# Altium PCB PassProgrammer.PcbDoc
Units mm, origin at the board's own origin, x right, y up, seen from the top; angles counter-clockwise.
Board outline 50 x 28 mm, 2 copper layers (Top Layer, Bottom Layer), stack 1.535 mm thick; 18 components, 10 nets, 66 pads, 10 vias.
Unrouted connection lines stored in the file: 2.
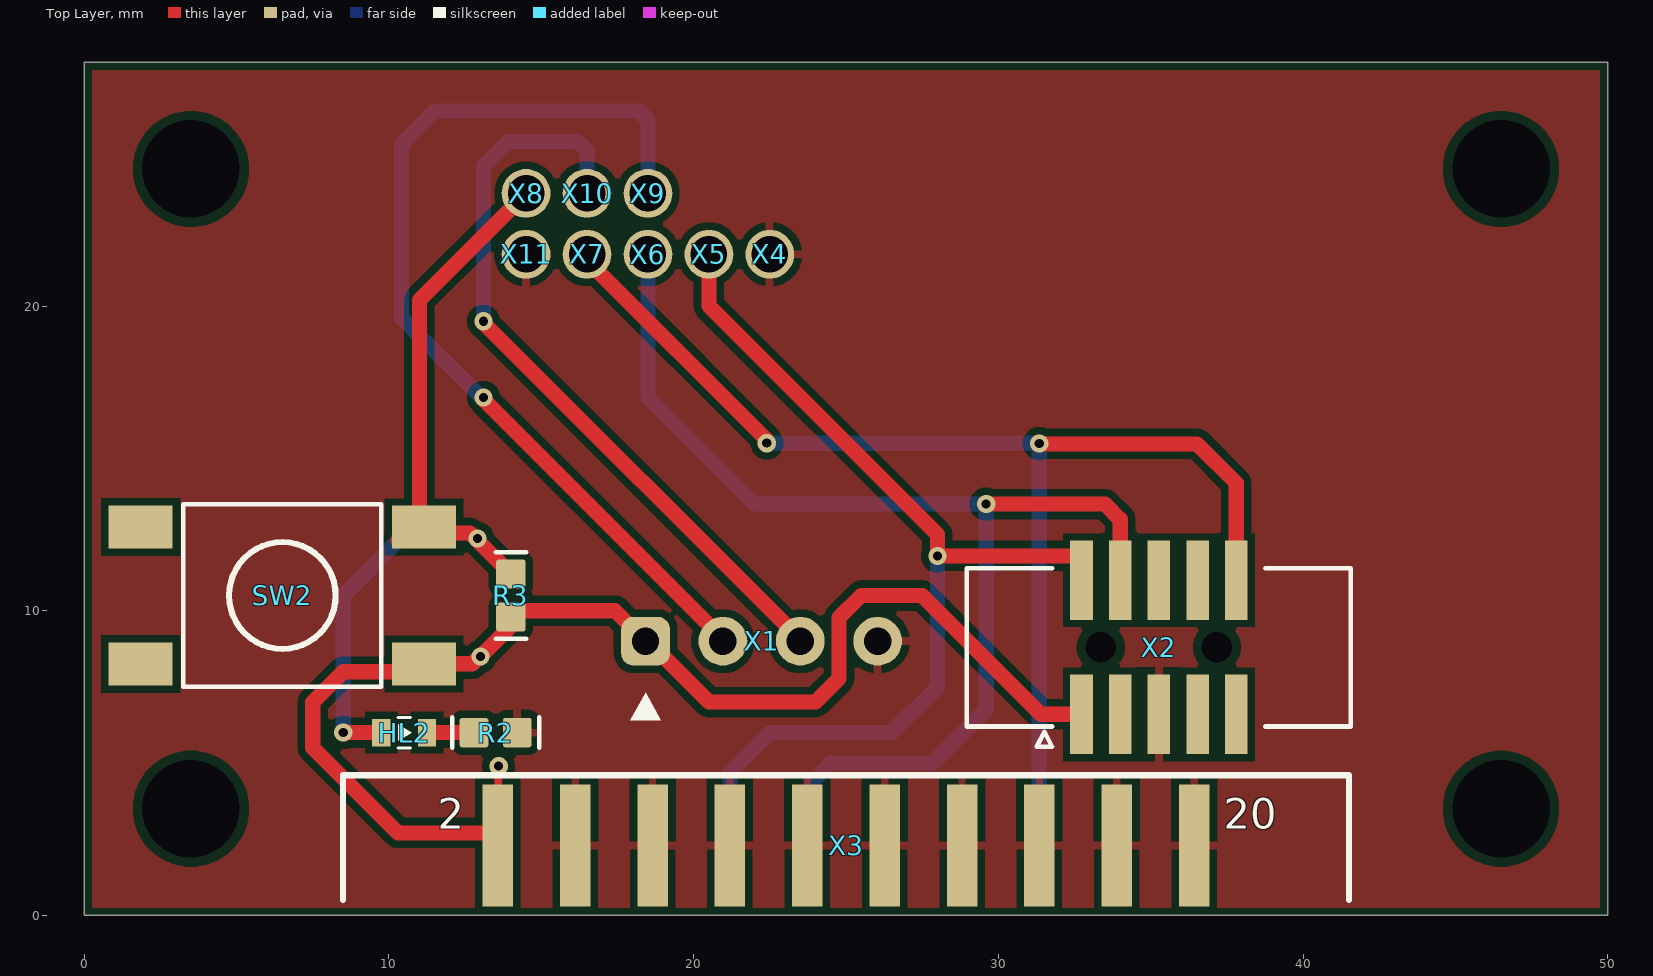
[diagram p0: Top Layer view]
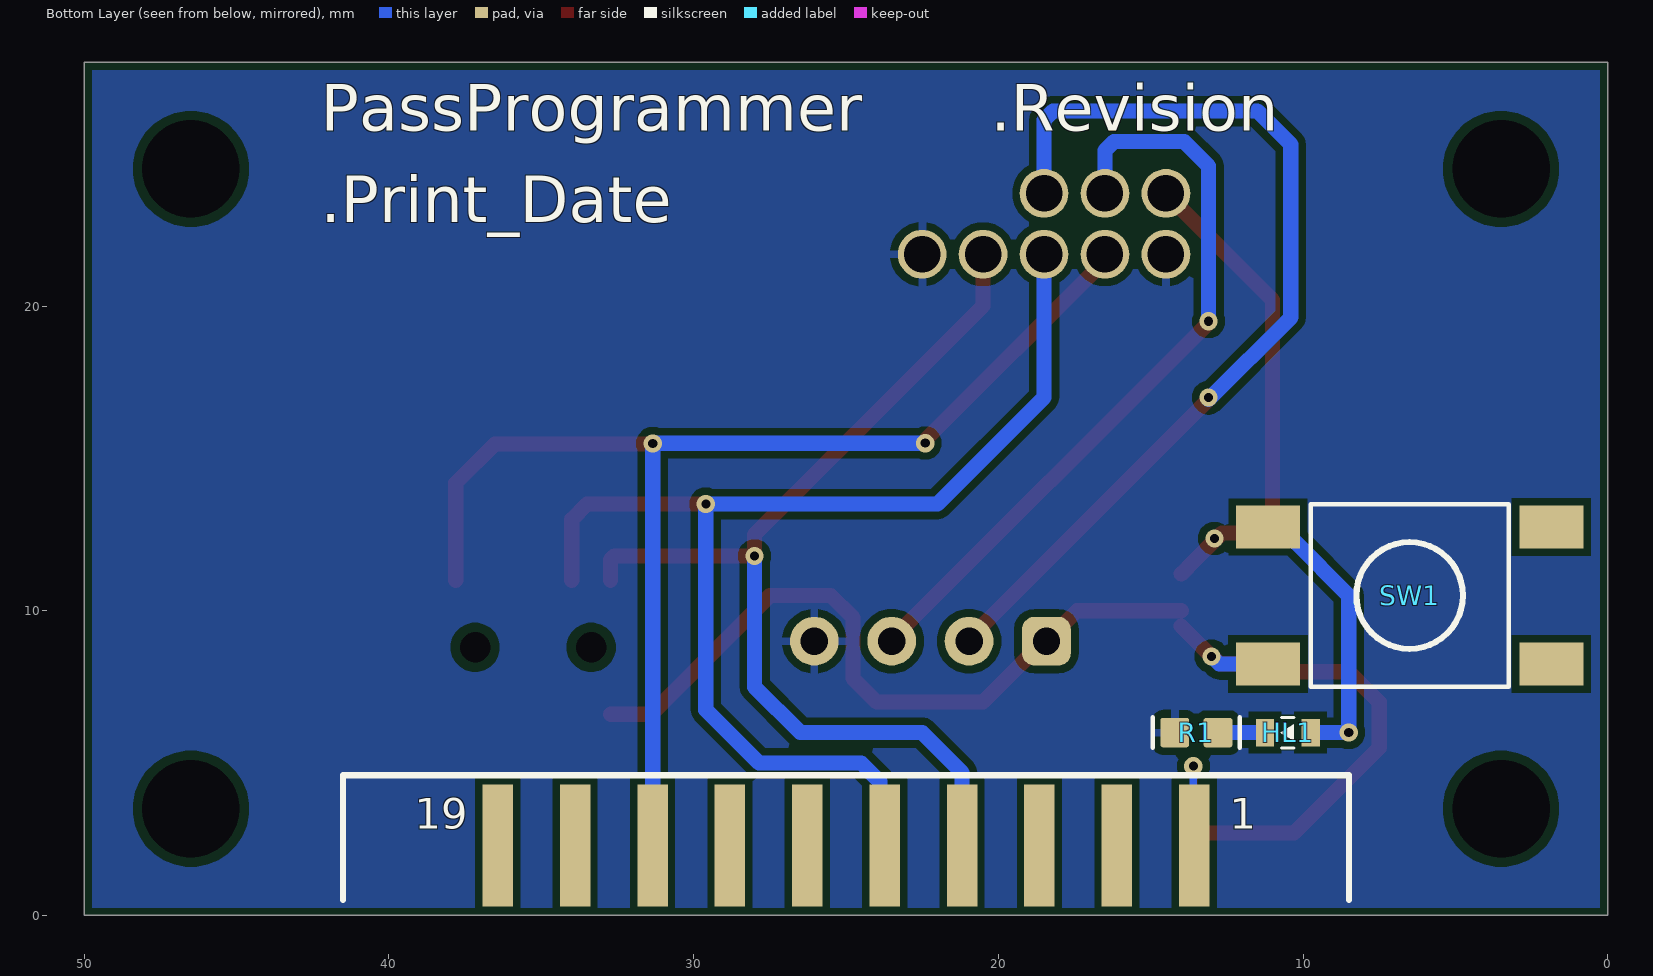
[diagram p1: Bottom Layer view, seen from below]

## Layer stack, top to bottom
Top Solder: solder mask 0.0102, Solder Resist, Dk 3.5
Top Layer: signal copper 0.0175
Dielectric 1: dielectric 1.5, FR-4, Dk 4.8
Bottom Layer: signal copper 0.0175
Bottom Solder: solder mask 0.0102, Solder Resist, Dk 3.5

## Board outline
0,0 0,28 50,28 50,0

## Design rules (kind name [scope] priority, off if disabled: settings)
BoardOutlineClearance [All] p1: gap=0.25 ignorepadtopadclearanceinfootprint=FALSE
Clearance ClearanceJTAG [InNetClass('JTAG')] p1: gap=0.2 ignorepadtopadclearanceinfootprint=FALSE
Clearance ClearanceKeepout [OnLayer('Keep-Out Layer')] p2: gap=0.25 ignorepadtopadclearanceinfootprint=FALSE
Clearance [All] p3: gap=0.15 ignorepadtopadclearanceinfootprint=FALSE except(0.25: Arc-Fill Arc-Poly Arc-Region Track-Fill Track-Poly Track-Region SMDPad-Fill SMDPad-Poly SMDPad-Region THPad-Fill THPad-Poly THPad-Region Via-Fill Via-Poly Via-Region Fill-Fill Fill-Poly Fill-Region Poly-Poly Poly-Region Region-Region; 0.3: Arc-Hole Track-Hole SMDPad-Hole THPad-Hole Via-Hole Fill-Hole Poly-Hole Region-Hole Text-Hole)
MinimumAnnularRing [All] p1: minimumring=0.2
MinimumSolderMaskSliver [All] p1: minsoldermaskwidth=0.15
PolygonConnect [All] p1: thpad.connectstyle=Relief thpad.reliefconductorwidth=0.254 thpad.reliefentries=4 thpad.polygonreliefangle="90 Angle" thpad.airgapwidth=0.254 smdpad.connectstyle=Relief smdpad.reliefconductorwidth=0.254 smdpad.reliefentries=4 smdpad.polygonreliefangle="90 Angle" smdpad.airgapwidth=0.254 via.connectstyle=Direct via.reliefconductorwidth=0.254 via.reliefentries=4 via.polygonreliefangle="90 Angle" via.airgapwidth=0.254
RoutingVias [All] p1: holewidth=0.3 width=0.6 viastyle="Through Hole" minholewidth=0.3 minwidth=0.6 maxholewidth=0.5 maxwidth=1
SilkToSilkClearance [All] p1: silktosilkclearance=0.1
SilkToSolderMaskClearance [IsPad] p1: minsilkscreentomaskgap=0.1 clearancetoexposedcopper=FALSE
SolderMaskExpansion [All] p1: expansion=0.05 istentingtop=FALSE
Width WidthJTAG [InNetClass('JTAG')] p1: maxlimit=0.2 minlimit=0.2 preferedwidth=0.2
Width [All] p2: maxlimit=2 minlimit=0.15 preferedwidth=0.15
27 further rules are at their usual default settings.

## Components (designator, comment, footprint, x,y, rotation, side; value= is the part's Value field where it differs from the comment)
HL1 "FYLS-0603URC" LED_0603_RED 10.5,6 r180 bottom
HL2 "FYLS-0603URC" LED_0603_RED 10.5,6 r180 top
R1 "3.3k" "R0603 (1608 Metric) N" 13.5,6 r0 bottom
R2 "3.3k" "R0603 (1608 Metric) N" 13.5,6 r0 top
R3 "0.0" "R0603 (1608 Metric) N" 14,10.5 r90 top
SW1 "EVQ-PBC04M" "TACT SWITCH 6MM SMD" 6.5,10.5 r0 bottom
SW2 "EVQ-PBC04M" "TACT SWITCH 6MM SMD" 6.5,10.5 r180 top
X1 "PLS-4" PLS-4 22.23,9 r0 top
X2 "KLS1-202C-10-T-B" KLS1-202C-10-T-B 35.27,8.8 r0 top
X3 "BH-20" BH-20-H 25,1 r0 top
X4 "" "POGO-PIN 1,02*15,85"#1 26.5,21.7 r0 top
X5 "" "POGO-PIN 1,02*15,85"#2 23.5,21.7 r0 top
X6 "" "POGO-PIN 1,02*15,85"#3 20.5,21.7 r0 top
X7 "" "POGO-PIN 1,02*15,85"#4 17.5,21.7 r0 top
X8 "" "POGO-PIN 1,02*15,85"#5 14.5,23.7 r0 top
X9 "" "POGO-PIN 1,02*15,85"#6 17.5,18.7 r0 top
X10 "" "POGO-PIN 1,02*15,85"#7 13.5,15.7 r0 top
X11 "" "POGO-PIN 1,02*15,85"#7 11.5,13.7 r0 top

## Footprints (in the part's own frame and the unit in brackets; to place one, negate y for a bottom-side part, rotate by r counter-clockwise, add the part's x,y. Pads: shape width x height; smd on the part's side, far side on the other; paste and mask are expansions set on the pad)
BH-20-H [mm] "Horisontal"
  rect 1x4 smd far side: 1(-11.43,1.3) 3(-8.89,1.3) 5(-6.35,1.3) 7(-3.81,1.3) 9(-1.27,1.3) 11(1.27,1.3) 13(3.81,1.3) 15(6.35,1.3) 17(8.89,1.3) 19(11.43,1.3)
  rect 1x4 smd: 2(-11.43,1.3) 4(-8.89,1.3) 6(-6.35,1.3) 8(-3.81,1.3) 10(-1.27,1.3) 12(1.27,1.3) 14(3.81,1.3) 16(6.35,1.3) 18(8.89,1.3) 20(11.43,1.3)
  silkscreen extent -16.51,-0.5 16.51,3.6, body extent -16.6,-10.47 16.6,1.63, height 4.02
KLS1-202C-10-T-B [mm]
  round 0 hole 1 unplated: 0(-1.905,0) 0(1.905,0)
  rect 0.74x2.6 smd: 1(-2.54,-2.2) 2(-2.54,2.2) 3(-1.27,-2.2) 4(-1.27,2.2) 5(0,-2.2) 6(0,2.2) 7(1.27,-2.2) 8(1.27,2.2) 9(2.54,-2.2) 10(2.54,2.2)
  silkscreen extent -6.3,-3.27 6.3,2.6, body extent -6.27,-3.3 6.27,3.3, height 5.2
LED_0603_RED [mm]
  rect 0.6x0.9 smd: A(0.75,0) C(-0.75,0)
  Top Layer pour cut-out: -0.45,0.6 -0.45,-0.6 0.45,-0.6 0.45,0.6
  silkscreen extent -0.25,-0.5 0.2,0.5, body extent -0.8,-0.4 0.8,0.4, height 0.6
PLS-4 [mm]
  rrect50% 1.6x1.6 hole 0.9: 1(-3.81,0)
  round 1.6 hole 0.9: 2(-1.27,0) 3(1.27,0) 4(3.81,0)
  silkscreen extent -4.31,-2.6 -3.31,-1.7, body extent -5.08,-1.27 5.08,1.27, height 8.54
"POGO-PIN 1,02*15,85"#1 [mm]
  round 1.6 hole 1.2: 1(-4,0)
"POGO-PIN 1,02*15,85"#2 [mm]
  round 1.6 hole 1.2: 1(-3,0)
"POGO-PIN 1,02*15,85"#3 [mm]
  round 1.6 hole 1.2: ""(-2,0)
"POGO-PIN 1,02*15,85"#4 [mm]
  round 1.6 hole 1.2: 1(-1,0)
"POGO-PIN 1,02*15,85"#5 [mm]
  round 1.6 hole 1.2: 1(0,0)
"POGO-PIN 1,02*15,85"#6 [mm]
  round 1.6 hole 1.2: 1(1,5)
"POGO-PIN 1,02*15,85"#7 [mm]
  round 1.6 hole 1.2: 1(3,8)
"R0603 (1608 Metric) N" [mm] "Resistor, Chip; 1.60 mm L X 0.80 mm W X 0.95 mm H body"
  rrect20% 0.95x0.97 smd: 1(-0.71,0) 2(0.71,0)
  Top Layer pour cut-out: -0.2,0.5 0.2,0.5 0.2,-0.5 -0.2,-0.5
  silkscreen extent -1.43,-0.5 1.43,0.5, body extent -0.8,-0.4 0.8,0.4, height 0.95
"TACT SWITCH 6MM SMD" [mm]
  rect 2.1x1.4 smd: 1(-4.65,2.25) 1(4.65,2.25) 2(-4.65,-2.25) 2(4.65,-2.25)
  silkscreen extent -3.25,-3 3.25,3, body extent -5,-3 5,3, height 5.07

## Part data
HL1 HL2: library part "Led 0603 Red", "Led 0603 Red", Manufacturer=FORYARD, Color="Led 0603 Red", ComponentLink1Description=Datasheet, ComponentLink1URL=https://www.elitan.ru/pdf/1/4/8/3/0/14830587.pdf, Part Number=FYLS-0603URC, Points=2
R1 R2: library part RC0603FR-073K3L, "RES SMD 3.3K OHM 1% 1/10W 0603", Manufacturer=Yageo, Operating Temperature="-55°C ~ 155°C", Package / Case="0603 (1608 Metric)", Power (Watts)="0.1W, 1/10W", Supplier Device Package=0603, Supplier Part Number 1=311-3.30KHRCT-ND, Temperature Coefficient=±100ppm/°C, Tolerance=±1%, ValueGOST=3.3кОм, ComponentLink1Description=Datasheet, ComponentLink1URL=http://www.yageo.com/documents/recent/PYu-RC_Grou, Composition="Thick Film", Features="Moisture Resistant", Height - Seated (Max)="0.022\" (0.55mm)", Image=//media.digikey.com/Renders/Yageo%20Renders/0603-(1608-Metric).jpg, Part Number=RC0603FR-073K3L, Part Status=Active, Part Type=Resistor, Points=2, Series=RC, Size / Dimension="0.063\" L x 0.031\" W (1.60mm x 0.80mm)", Supplier 1=Digikey, Unit Price (USD)=0.10000
R3: library part RC0603JR-070RL, "RES SMD 0.0OHM JUMPER 1/10W 0603", Manufacturer=Yageo, Operating Temperature="-55°C ~ 155°C", Package / Case="0603 (1608 Metric)", Power (Watts)="0.1W, 1/10W", Supplier Device Package=0603, Supplier Part Number 1=311-0.0GRCT-ND, Temperature Coefficient=-, Tolerance=Jumper, ComponentLink1Description=Datasheet, ComponentLink1URL=http://www.yageo.com/documents/recent/PYu-RC_Grou, Composition="Thick Film", Features="Moisture Resistant", Height - Seated (Max)="0.022\" (0.55mm)", Image=//media.digikey.com/Renders/Yageo%20Renders/0603-(1608-Metric).jpg, Part Number=RC0603JR-070RL, Part Status=Active, Part Type=Resistor, Points=2, Series=RC, Size / Dimension="0.063\" L x 0.031\" W (1.60mm x 0.80mm)", Supplier 1=Digikey, Unit Price (USD)=0.10000, ValueGOST=0.0
SW1 SW2: "SWITCH TACTILE SPST-NO 0.02A 15V", Contact Rating @ Voltage="0.02A @ 15VDC", Illumination Type, Color=-, Manufacturer="Panasonic Electronic Components", Operating Force=100gf, Supplier Part Number 1=P8013S-ND, Actuator Height off PCB, Vertical=4.30mm, Actuator Length, Right Angle=-, Actuator Orientation="Top Actuated", Actuator Type=Standard, Circuit=SPST-NO, ComponentLink1Description=Datasheet, Features="Grounding Pin", Illumination=Non-Illuminated, Illumination Voltage (Nominal)=-, Image=//media.digikey.com/photos/Panasonic%20Photos/EVQ-PBC04M,%20EVQ-PBD04M,%20EVQ-PBE04M,%20EVQ-PBG04M.jpg, Ingress Protection=-, Mounting Type="Through Hole", Outline="6.00mm x 6.00mm", Packaging=Bulk, Part Number=EVQ-PBC04M, Part Status=Active, Series=EVQPB, Supplier 1=Digikey, Switch Function=Off-Mom, Termination Style="PC Pin", ﻿ComponentLink1URL=https://www3.panasonic.biz/ac/e_download/control/switch/light-touch/catalog/sw_lt_eng_5n.pdf
X2: "5*2 pin 	1.27x1.27mm Pitch Box Header Connector Height 4.9mm", Manufacturer=KLS, ComponentLink1Description=Datasheet, ComponentLink1URL=https://www.klsele.com/admin/product_upload/20200628111111L-KLS1-202CE.pdf, Local Supplier=https://www.elitan.ru/price/item16066919, Mounting Type="0.050\" (1.27mm)", Number of Positions=5, Number of Rows=2, Part Number=KLS1-202C-10-T-B, Pitch="0.050\" (1.27mm)"
X3: library part Terminal_2x10_JTAG, Part Number=BH-20
X4 X5 X6 X7 X8 X9 X10 X11: library part PogoPin
X1: Part Number=PLS-4, Series=PLS

## Free pads (board coordinates)
  round 2 hole 3.2 unplated: 0(3.5,3.5) 0(3.5,24.5) 0(46.5,3.5) 0(46.5,24.5)

## Via types
v1: diameter 0.6, hole 0.3, Top Layer to Bottom Layer, tented both sides, 10 vias

## Nets (pads, with @x,y where several pads share a name; then routed paths per layer and width w, separated by ;. In a path a pad name is that pad's centre, name@x,y a point inside that pad or via, vN(x,y) a via of type N, cw(c..) or ccw(c..) an arc to the next point about the centre after c; other vN are vias at no path point)
GND: R1.2 R2.2 X1.4 X2.5 X3.4 X3.6 X3.8 X3.10 X3.12 X3.14 X3.16 X3.18 X3.20 X4.1 X11.1
NetHL1_C: HL1.C R1.1 | length 1.5
  Bottom Layer w0.5: HL1.C R1.1
NetHL2_C: HL2.C R2.1 | length 1.5
  Top Layer w0.5: HL2.C R2.1
RESET: X2.10 X3.15 X7.1 | length 41
  Top Layer w0.5: X7.1 16.5,21.5 22.4,15.6 v1(22.4,15.5) ; v1(31.343,15.489) 31.358,15.474 36.526,15.474 37.81,14.19 X2.10
  Bottom Layer w0.5: v1(22.4,15.5) 22.405,15.495 31.337,15.495 v1(31.343,15.489) 31.346,15.486 31.346,2.304 X3.15
RX: X1.3 X10.1 | length 25.2
  Top Layer w0.5: v1(13.1,19.5) 13.1,19.45 23.5,9.05 X1.3
  Bottom Layer w0.5: v1(13.1,19.5) 13.1,24.6 13.9,25.4 16.207,25.4 16.5,25.107 X10.1
SWDCLK: X2.4 X3.9 X6. | length 39.5
  Top Layer w0.5: v1(29.6,13.5) 33.5,13.5 34,13 X2.4
  Bottom Layer w0.5: X6. 18.5,17 22,13.5 v1(29.6,13.5) 29.6,6.741 27.859,5 24.5,5 23.895,4.395 X3.9@23.895,2.165
SWDIO: X2.2 X3.7 X5.1 | length 33.4
  Top Layer w0.5: X5.1 20.5,20 28,12.5 v1(28,11.8) 32.61,11.8 32.73,11.68 X2.2
  Bottom Layer w0.5: X3.7@21.19,2 21.19,4.69 22.5,6 26.5,6 28,7.5 v1(28,11.8)
TX: X1.2 X9.1 | length 31.8
  Top Layer w0.5: v1(13.1,17) 13.1,16.93 20.96,9.07 X1.2
  Bottom Layer w0.5: v1@13.1,16.93 10.4,19.63 10.4,25.3 11.5,26.4 18.207,26.4 18.5,26.107 X9.1
VCC: R3.1 SW1.1 SW2.1 X1.1 X2.1 X3.1 X3.2 | length 47.6
  Top Layer w0.25: X3.2@13.585,2.315 v1@13.585,4.885
  Top Layer w0.5: SW2.1@10.778,8 8.5,8 7.5,7 7.5,5.5 10.293,2.707 13.163,2.707 X3.2 X3.2@13.585,2.315 ; SW2.1@10.778,8.257 12.73,8.257 12.973,8.5 v1(13,8.5) R3.1@14,9.5 ; v1@13.585,4.885 v1(13.6,4.9) ; R3.1@14,10 17.42,10 X1.1 ; X1.1@18.5,9 20.5,7 24,7 24.771,7.771 24.771,9.771 25.5,10.5 27.5,10.5 31.4,6.6 X2.1
  Bottom Layer w0.25: X3.1 13.6,2.33 v1(13.6,4.9)
  Bottom Layer w0.5: SW1.1@11.15,8.25 12.75,8.25 v1(13,8.5)
VCCM: HL1.A HL2.A R3.2 SW1.2 SW2.2 X8.1 | length 25.9
  Top Layer w0.5: v1(8.5,6) HL2.A@9.5,6 ; SW2.2@10.3,12.3 10.35,12.3 10.5,12.45 SW2.2@10.5,12.5 ; R3.2 13.99,11.21 13.765,11.435 13.765,11.445 12.657,12.553 11.347,12.553 11.15,12.75 11,12.9 11,14.5 11,20.2 X8.1
  Bottom Layer w0.5: HL1.A v1(8.5,6) 8.5,10.5 10.3,12.3 10.35,12.3 10.5,12.45 SW1.2@10.5,12.5
  other v1: 12.905,12.373
pads on no net: X2.0 X2.3 X2.6 X2.7 X2.8 X2.9 X3.3 X3.5 X3.11 X3.13 X3.17 X3.19

## Polygon pours and split planes (outlines as drawn)
GND on Bottom Layer "GND_L02_P001" (solid, pour order 1): 0,28 50,28 50,0 0,0
GND on Top Layer "GND_L01_P000" (solid, pour order 0): 0,28 50,28 50,0 0,0

## Silkscreen, mask and mechanical layers (free items; w line width, h text height)
Bottom Overlay:
  text ".Revision" at 20.246,25.754 h1.52
  text "PassProgrammer" at 42.246,25.762 h1.52
  text ".Print_Date" at 42.246,22.754 h1.52
Mechanical 1:
  the board outline again, w0.2
Mechanical 2:
  circle w0.15: c46.5,24.5 r3.5
  circle w0.15: c3.5,24.5 r3.5
  circle w0.15: c46.5,3.5 r3.5
  circle w0.15: c3.5,3.5 r3.5
Board:
  lines w0.01: 12.6,15 12.6,60.6 37.4,60.6 37.4,15 12.6,15

## Text inside footprints (layer, text, board x,y; h text height)
X3: Top Overlay "20" at 37.4,2.85 h1; Top Overlay "2" at 11.6,2.85 h1; Bottom Overlay "19" at 39.154,2.85 h1; Bottom Overlay "1" at 12.4,2.85 h1